# Altium PCB PCB_2021-01-26_15-46-11_2021-01-26.pcbdoc
Units mm, origin at the board's own origin, x right, y up, seen from the top; angles counter-clockwise.
Board outline 158.86 x 93.51 mm, 2 copper layers (Top Layer, Bottom Layer); 47 components, 76 nets, 202 pads, 50 vias.
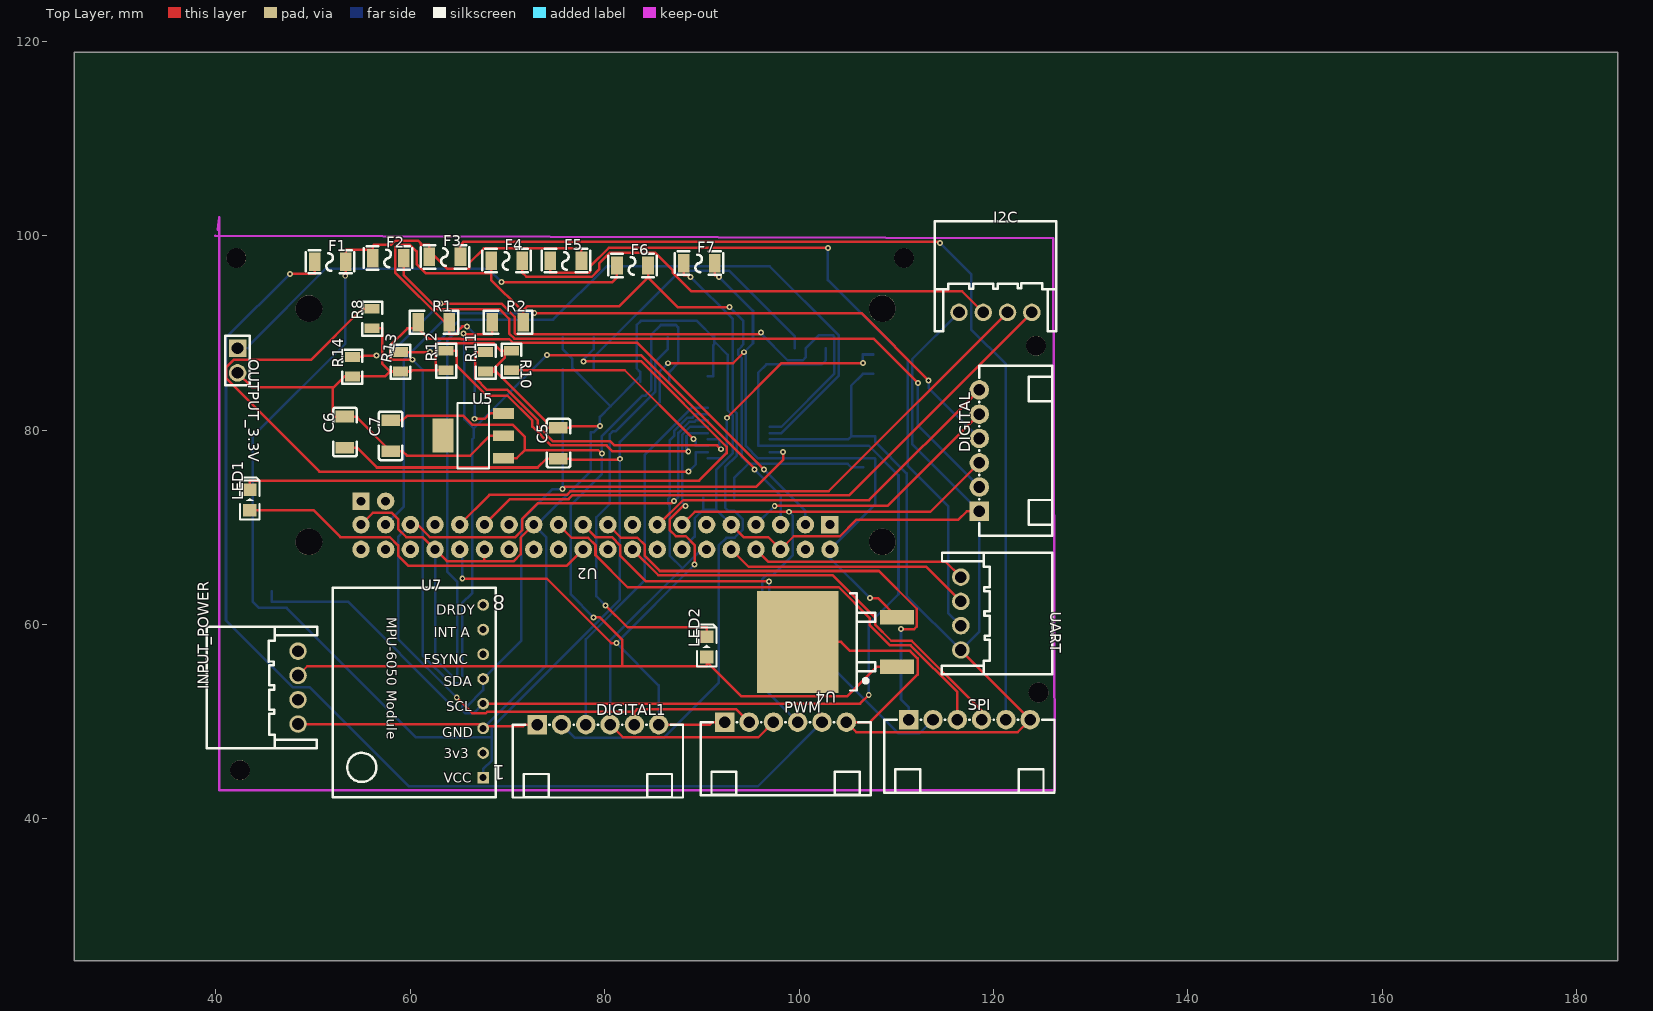
[diagram p0: Top Layer view]
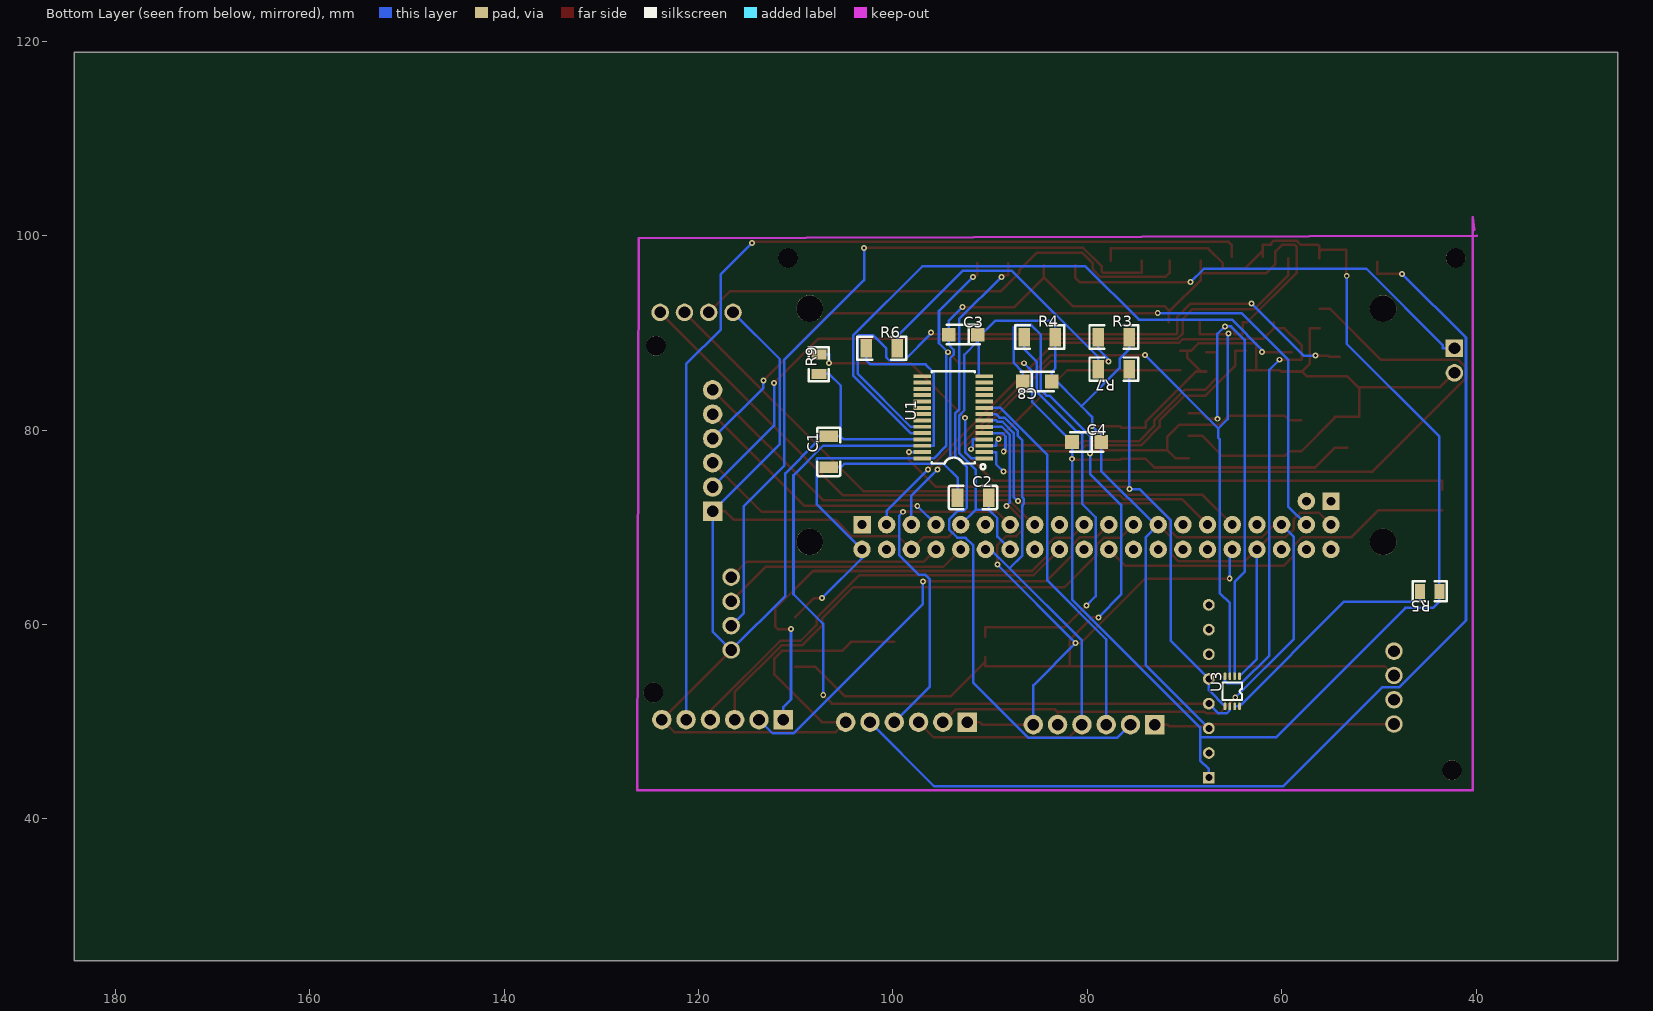
[diagram p1: Bottom Layer view, seen from below]

## Layer stack, top to bottom
Top Layer: signal copper (thickness not stored)
Dielectric: dielectric 0.32, FR-4, Dk 4.8
Bottom Layer: signal copper (thickness not stored)

## Board outline
184.259,25.4 25.4,25.4 25.4,118.914 184.259,118.914

## Components (designator, comment, footprint, x,y, rotation, side; value= is the part's Value field where it differs from the comment)
C1 "1uF" C1206#1 106.611,77.778 r270 bottom
C2 "1uF" C1206#1 91.752,73.079 r0 bottom
C3 "10uF" CAP-SMD_L3.2-W1.6-R-RD 92.768,89.843 r0 bottom
C4 "10uF" CAP-SMD_L3.2-W1.6-R-RD 80.068,78.794 r0 bottom
C5 "1uF" C1206#2 75.242,78.667 r90 top
C6 "1uF" C1206#2 53.271,79.81 r90 top
C7 "1uF" C1206#2 57.97,79.429 r90 top
C8 "10uF" CAP-SMD_L3.2-W1.6-R-RD 85.148,85.017 r180 bottom
DIGITAL "Digital" CONN-TH_XH-6AW_C722881 118.549,77.905 r90 top
DIGITAL1 "Digital" CONN-TH_XH-6AW_C722881 79.306,49.711 r0 top
F1 "1206FT 1.25A" F1206 51.747,97.336 r0 top
F2 "1206FT 1.25A" F1206 57.716,97.717 r0 top
F3 "1206FT 1.25A" F1206 63.558,97.844 r0 top
F4 "1206FT 1.25A" F1206 69.908,97.463 r0 top
F5 "1206FT 1.25A" F1206 76.004,97.463 r0 top
F6 "1206FT 1.25A" F1206 82.862,96.955 r0 top
F7 "1206FT 1.25A" F1206 89.72,97.209 r0 top
I2C "I2C" CONN-TH_XH-4AWD 120.2,92.129 r0 top
INPUT_POWER "Input Power" CONN-TH_XH-4AWD 48.445,53.521 r90 top
LED1 "LED-0805_B" LED0805_BLUE 43.492,72.825 r90 top
LED2 "LED-0805_B" LED0805_BLUE 90.482,57.712 r90 top
OUTPUT_3.3V "OUTPUT_POWER3.3V" HDR-TH_2P-P2.54-V 42.222,87.176 r270 top
PWM "PWM" CONN-TH_XH-6AW_C722881 98.61,49.965 r0 top
R1 "4.7K" R1206#1 62.415,91.113 r0 top
R2 "4.7K" R1206#1 70.035,91.113 r0 top
R3 "1k" R1206#2 77.274,89.589 r0 bottom
R4 "1k" R1206#2 84.894,89.589 r0 bottom
R5 "200K" R0805#1 44.762,63.427 r180 bottom
R6 "4.7K" R1206#2 101.15,88.446 r0 bottom
R7 "4.7K" R1206#2 77.274,86.287 r180 bottom
R8 "10K" R0805#2 56.065,91.494 r90 top
R9 "10K" R0805#1 107.627,86.795 r270 bottom
R10 "10K" R0805#2 70.416,87.176 r270 top
R11 "10K" R0805#2 67.749,87.049 r90 top
R12 "10K" R0805#2 63.685,87.176 r90 top
R13 "10K" R0805#2 58.986,87.049 r90 top
R14 "10K" R0805#2 54.033,86.541 r90 top
SPI "SPI" CONN-TH_XH-6AW_C722881 117.533,50.219 r0 top
U1 "PCA9685PW/Q900,118" TSSOP-28_L9.7-W4.4-P0.65-LS6.4-BL 93.784,81.334 r270 bottom
U2 "Raspberry Pi Zero W" "RASPBERRY PI ZERO" 79.052,80.445 r180 top
U3 "PCA9306DCUR" VSSOP-8_L2.4-W2.1-P0.50-LS3.2-BR 65.082,53.14 r270 bottom
U4 "MC7805CD2TR4G" TO-263-2_L10.0-W9.1-P5.08-LS15.2-TL 104.96,58.22 r180 top
U5 "MCP1703-3302E/DB" SOT-223_L6.5-W3.5-P2.30-LS7.0-BR 66.479,79.429 r0 top
U7 "SENSOR GY-87" "MPU-6050 GY-87" 67.495,53.902 r0 top
UART "UART" CONN-TH_XH-4AWD 116.644,61.141 r270 top
? "" ? 83.624,40.567 r0 top
? "" ? 154.147,74.373 r0 top

## Footprints (in the part's own frame and the unit in brackets; to place one, negate y for a bottom-side part, rotate by r counter-clockwise, add the part's x,y. Pads: shape width x height; smd on the part's side, far side on the other; paste and mask are expansions set on the pad)
C1206#1 [mm]
  rect 1.2x1.9 smd: 1(1.6,0) 2(-1.6,0)
  silkscreen extent -2.5,-1.2 2.5,1.2
C1206#2 [mm]
  rect 1.2x1.9 smd: 1(-1.6,0) 2(1.6,0)
  silkscreen extent -2.5,-1.2 2.5,1.2
CAP-SMD_L3.2-W1.6-R-RD [mm]
  rect 1.4x1.4 smd: 1(-1.5,0) 2(1.5,0)
  silkscreen extent -1.7,-1 1.7,1
CONN-TH_XH-4AWD [mm]
  round 1.8 hole 1.199: 1(-3.75,0) 2(-1.248,0) 3(1.251,0) 4(3.75,0)
  silkscreen extent -6.24,-1.96 6.26,9.39
CONN-TH_XH-6AW_C722881 [mm]
  rect 2x2 hole 1.2: 1(-6.25,0)
  round 2 hole 1.2: 2(-3.75,0) 3(-1.25,0) 4(1.25,0) 5(3.75,0) 6(6.25,0)
  silkscreen extent -8.75,-7.5 8.75,0
F1206 [mm]
  rect 1.2x1.9 smd: 1(-1.6,0) 2(1.6,0)
  silkscreen extent -2.5,-1.2 2.5,1.2
HDR-TH_2P-P2.54-V [mm]
  rect 1.8x1.8 hole 1.2: 1(-1.27,0)
  round 1.8 hole 1.2: 2(1.27,0)
  silkscreen extent -2.54,-1.27 2.54,1.27
LED0805_BLUE [mm]
  rect 1.3x1.4 smd: 1(-1.05,0) 2(1.05,0)
  silkscreen extent -2,-1 2.3,1
"MPU-6050 GY-87" [mil]
  rect 47.5x47.5 hole 28.6: 1(0,-380)
  round 47.5 hole 28.6: 2(0,-280) 3(0,-180) 4(0,-80) 5(0,20) 6(0,120) 7(0,220) 8(0,320)
  silkscreen extent -610,-460 51,390
R0805#1 [mm]
  rect 1x1.55 smd: 1(1,0) 2(-1,0)
  silkscreen extent -1.75,-1.02 1.75,1.02
R0805#2 [mm]
  rect 1x1.55 smd: 1(-1,0) 2(1,0)
  silkscreen extent -1.75,-1.02 1.75,1.02
R1206#1 [mm]
  rect 1.2x1.9 smd: 1(-1.6,0) 2(1.6,0)
  silkscreen extent -2.5,-1.2 2.5,1.2
R1206#2 [mm]
  rect 1.2x1.9 smd: 1(1.6,0) 2(-1.6,0)
  silkscreen extent -2.5,-1.2 2.5,1.2
"RASPBERRY PI ZERO" [mm]
  rect 1.8x1.8 hole 0.914: 1(-24.13,10.16) 42(24.13,7.747)
  round 1.8 hole 0.914: 2(-24.131,12.7) 3(-21.591,10.16) 4(-21.591,12.7) 5(-19.051,10.16) 6(-19.051,12.7) 7(-16.511,10.16) 8(-16.511,12.7) 9(-13.971,10.16) 10(-13.971,12.7) 11(-11.431,10.16) 12(-11.431,12.7) 13(-8.891,10.16) 14(-8.891,12.7) 15(-6.351,10.16) 16(-6.351,12.7) 17(-3.811,10.16) 18(-3.811,12.7) 19(-1.271,10.16) 20(-1.271,12.7) 21(1.269,10.16) 22(1.269,12.7) 23(3.809,10.16) 24(3.809,12.7) 25(6.349,10.16) 26(6.349,12.7) 27(8.889,10.16) 28(8.889,12.7) 29(11.429,10.16) 30(11.429,12.7) 31(13.969,10.16) 32(13.969,12.7) 33(16.509,10.16) 34(16.509,12.7) 35(19.049,10.16) 36(19.049,12.7) 37(21.589,10.16) 38(21.589,12.7) 39(24.13,10.16) 40(24.13,12.7) 41(21.59,7.747)
  round 2.748 hole 2.748 unplated: ""(-29.513,-12.07) ""(-29.513,11.931) ""(29.486,-12.07) ""(29.486,11.931)
SOT-223_L6.5-W3.5-P2.30-LS7.0-BR [mil]
  rect 85x43 smd: 1(122,-90.5) 2(122,0.5) 3(122,90.5)
  rect 85x138 smd: 4(-122,0.5)
  silkscreen extent -64,-132 64,132
TO-263-2_L10.0-W9.1-P5.08-LS15.2-TL [mm]
  rect 3.504x1.5 smd: 1(-5.106,2.54) 3(-5.106,-2.54)
  rect 8.38x10.49 smd: 4(5.107,0)
  silkscreen extent -2.89,-5 -0.29,5
TSSOP-28_L9.7-W4.4-P0.65-LS6.4-BL [mil]
  rect 16x71 smd: 1(166.34,125.98) 2(140.75,125.98) 3(115.16,125.98) 4(89.57,125.98) 5(63.98,125.98) 6(38.39,125.98) 7(12.8,125.98) 8(-12.79,125.98) 9(-38.38,125.98) 10(-63.97,125.98) 11(-89.56,125.98) 12(-115.15,125.98) 13(-140.74,125.98) 14(-166.34,125.98) 15(-166.34,-125.98) 16(-140.75,-125.98) 17(-115.16,-125.98) 18(-89.57,-125.98) 19(-63.98,-125.98) 20(-38.39,-125.98) 21(-12.8,-125.98) 22(12.79,-125.98) 23(38.38,-125.98) 24(63.97,-125.98) 25(89.57,-125.98) 26(115.16,-125.98) 27(140.75,-125.98) 28(166.34,-125.98)
  silkscreen extent -187,-87 210,130
VSSOP-8_L2.4-W2.1-P0.50-LS3.2-BR [mm]
  oval 0.8x0.28 smd: 1(-1.55,0.75) 2(-1.55,0.25) 3(-1.55,-0.25) 4(-1.55,-0.75) 5(1.55,-0.75) 6(1.55,-0.25) 7(1.55,0.25) 8(1.55,0.75)
  silkscreen extent -0.9,-1 0.9,1.02
? [mm]

## Free pads (board coordinates)
  round 2.032 hole 2.032 unplated: ""(42.095,97.717) ""(42.476,45.012) ""(110.802,97.717) ""(124.391,88.7) ""(124.645,53.013)

## Via types
v1: diameter 0.61, hole 0.31, Top Layer to Bottom Layer, 50 vias

## Nets (pads, with @x,y where several pads share a name; then routed paths per layer and width w, separated by ;. In a path a pad name is that pad's centre, name@x,y a point inside that pad or via, vN(x,y) a via of type N, cw(c..) or ccw(c..) an arc to the next point about the centre after c; other vN are vias at no path point)
3.3V: C1.1 C2.1 C3.2 F4.1 F6.2 R1.2 R2.2 U3.2 U5.3 | length 142.9
  Top Layer w0.26: v1(65.844,90.696) 65.359,90.696 64.882,90.219 64.882,89.919 64.831,89.871 64.016,89.871 R1.2 63.564,91.113 58.425,96.254 58.425,98.875 58.636,99.086 59.959,99.086 60.637,98.408 60.637,97.115 61.603,96.147 68.308,96.147 ; v1(66.612,81.182) 67.661,81.182 68.207,81.728 U5.3 ; F4.1 68.308,96.147 ; R2.2 71.636,92.355 ; F6.2 84.463,95.713 ; v1(92.847,92.678) 87.498,92.678 84.463,95.713 ; 68.308,96.147 68.308,95.464 71.417,92.355 71.636,92.355 ; 71.636,92.355 72.019,92.739 81.488,92.739 84.463,95.713
  Bottom Layer w0.26: U3.2 64.834,64.397 63.812,65.418 63.812,89.307 65.204,90.696 v1(65.844,90.696) 66.612,89.932 v1(66.612,81.182) ; v1(92.847,92.678) 94.27,91.258 C3.2 94.27,89.348 94.27,88.85 94.099,88.68 94.099,88.636 93.739,88.276 93.739,87.78 94.099,87.42 94.099,77.234 94.778,76.556 ; C2.1 93.353,74.321 93.353,75.129 94.778,76.556 ; C1.1 105.369,76.178 104.991,76.556 94.778,76.556
5V: R6.2 R7.2 | length 29.6
  Bottom Layer w0.26: R7.2 78.875,87.529 87.78,96.434 92.804,96.434 99.55,89.688 R6.2
7.4V: C7.2 C8.1 INPUT_POWER.3 LED2.1 U4.1 U5.1 | length 142.1
  Top Layer w0.26: INPUT_POWER.3@48.445,54.771 49.393,55.718 81.796,55.718 ; C7.2 59.213,81.029 59.67,81.486 65.461,81.486 66.365,80.585 70.5,80.585 71.78,79.302 71.78,77.961 ; U5.1 70.95,77.13 71.78,77.961 ; v1(78.867,60.75) 79.494,60.75 81.796,58.449 81.796,55.718 ; v1(79.703,77.593) 79.334,77.961 71.78,77.961 ; LED2.1@90.482,56.66 LED2.1@90.482,56.191 ; U4.1@110.068,55.68 108.024,55.68 104.978,52.637 94.036,52.637 LED2.1@90.482,56.191 ; 81.796,55.718 90.482,55.718 LED2.1@90.482,56.191
  Bottom Layer w0.26: v1(78.867,60.75) 76.512,63.102 76.512,72.309 79.703,75.5 v1(79.703,77.593) 79.703,79.391 83.884,83.574 84.214,83.574 84.788,84.148 84.788,89.846 85.773,90.831 87.315,90.831 87.564,90.582 87.564,86.925 86.65,86.01 C8.1
+5V: C4.2 C5.1 C6.1 F1.2 F2.1 F3.1 F5.2 F7.2 R5.1 U1.28 U2.2 U4.3 U7.1 | length 246.1
  Top Layer w0.26: C6.1 54.514,78.21 56.556,76.168 73.101,76.168 74,77.067 74.623,77.067 C5.1 76.485,77.067 76.609,76.945 81.445,76.945 v1(81.57,77.067) ; v1(53.302,95.898) 53.348,95.944 F1.2 53.348,97.852 53.348,98.578 55.878,98.578 F2.1@56.116,98.337 ; F2.1 F2.1@56.116,98.337 ; F3.1 F3.1@61.958,98.464 ; F5.2 77.605,98.705 67.572,98.705 66.05,97.184 66.05,96.678 65.974,96.602 63.823,96.602 F3.1@61.958,98.464 ; v1(86.523,86.899) 93.208,86.899 v1(94.336,88.029) ; F7.2 91.321,95.967 91.585,95.967 v1(91.77,95.781) ; v1(107.29,62.723) 108.105,62.723 U4.3@110.068,60.76 ; F2.1@56.116,98.337 56.116,98.959 56.243,99.086 58.037,99.086 58.461,99.51 60.813,99.51 61.062,99.261 61.062,99.086 61.958,99.086 F3.1@61.958,98.464
  Bottom Layer w0.26: v1(53.302,95.898) 53.302,88.883 43.762,79.343 R5.1 43.762,62.36 44.407,61.715 47.275,61.715 60.587,48.403 68.392,48.403 ; U7.1 67.495,45.147 68.392,46.041 68.392,48.403 ; v1(86.523,86.899) 85.656,86.033 85.656,82.881 C4.2 v1(81.57,77.067) 81.57,62.604 68.392,49.426 68.392,48.403 ; v1(91.77,95.781) 95.26,92.292 95.26,88.954 v1(94.336,88.029) 94.521,87.841 94.521,78.377 95.791,77.11 U1.28 107.777,77.11 107.854,77.034 107.854,72.416 U2.2 103.182,66.828 v1(107.29,62.723)
A0: R9.2 U1.1 | length 24
  Top Layer w0.26: v1(92.57,81.286) 98.204,86.919 v1(106.561,86.919)
  Bottom Layer w0.26: U1.1 91.895,77.11 92.57,77.786 v1(92.57,81.286) ; v1(106.561,86.919) 106.561,87.796 R9.2
A1: R8.2 U1.2 | length 73.8
  Top Layer w0.26: R8.2 54.999,92.495 49.759,87.252 41.811,87.252 41.031,86.472 41.031,85.36 50.648,75.741 v1(88.631,75.741)
  Bottom Layer w0.26: v1(88.631,75.741) 89.39,76.503 89.39,77.758 U1.2@90.584,77.758
A2: R10.2 U1.3 | length 23.6
  Top Layer w0.26: R10.2@70.416,86.175 71.483,86.175 82.06,86.175 v1(89.134,79.104)
  Bottom Layer w0.26: v1(89.134,79.104) 89.39,78.845 89.39,78.408 U1.3@90.584,78.408
A3: R11.2 U1.4 | length 34.7
  Top Layer w0.26: R11.2 66.683,88.05 66.683,85.357 67.894,84.146 69.995,84.146 73.124,81.016 73.124,80.417 74.681,78.863 80.589,78.863 81.013,78.438 91.565,78.438 v1(91.956,78.047)
  Bottom Layer w0.26: U1.4@90.584,79.058 91.778,79.058 91.778,78.222 v1(91.956,78.047)
A4: R12.2 U1.5 | length 34.4
  Top Layer w0.26: R12.2 64.752,88.177 64.752,86.655 67.836,83.572 69.969,83.572 72.553,80.991 72.553,80.371 74.486,78.438 80.203,78.438 80.81,77.831 v1(88.598,77.831)
  Bottom Layer w0.26: v1(88.598,77.831) 88.417,78.012 88.417,79.386 88.74,79.708 U1.5
A5: R13.2 U1.24 | length 65.5
  Top Layer w0.26: R13.2 60.053,88.05 60.071,88.032 v1(62.009,88.032)
  Bottom Layer w0.26: v1(62.009,88.032) 62.009,88.258 65.131,91.377 74.699,91.377 80.193,96.869 96.985,96.869 104.066,89.787 104.066,85.596 98.179,79.708 U1.24@96.985,79.708
CLK: DIGITAL.3 PWM.4 U2.13 | length 58.3
  Top Layer w0.26: U2.13 89.271,71.613 v1(98.961,71.613) 113.508,71.613 DIGITAL.3
  Bottom Layer w0.26: v1(98.961,71.613) 99.372,71.202 99.372,67.171 97.353,65.149 96.69,65.149 96.192,64.654 96.192,53.633 PWM.4
DIGITAL1: DIGITAL.6 U2.15 | length 38.9
  Top Layer w0.26: U2.15 85.552,70.285 88.082,72.815 107.211,72.815 DIGITAL.6
DIGITAL1_2: DIGITAL1.2 F7.1 | length 68
  Top Layer w0.26: F7.1 88.12,95.967 88.661,95.967 v1(88.837,95.789)
  Bottom Layer w0.26: DIGITAL1.2 76.927,48.342 86.058,48.342 91.752,54.037 91.752,68.174 92.517,68.936 93.376,68.936 94.216,69.777 94.216,70.806 93.292,71.728 92.692,71.728 92.393,72.03 92.393,76.221 93.591,77.422 93.591,81.71 93.183,82.116 93.183,91.446 v1(88.837,95.789)
DIGITAL2: DIGITAL.5 U2.7 | length 27.7
  Top Layer w0.26: v1(97.495,72.218) 109.113,72.218 DIGITAL.5@118.549,81.654
  Bottom Layer w0.26: U2.7 v1(97.495,72.218)
DIGITAL3: DIGITAL.4 U2.37 | length 84.8
  Top Layer w0.26: v1(72.751,92.058) 106.424,92.058 v1(113.337,85.141)
  Bottom Layer w0.26: U2.37 59.299,72.121 59.299,87.227 64.13,92.058 v1(72.751,92.058) ; v1(113.337,85.141) 113.337,84.367 DIGITAL.4
DIGITAL_2: DIGITAL.2 F2.2 | length 73.5
  Top Layer w0.26: F2.2 59.317,96.475 59.317,95.959 62.842,92.434 69.21,92.434 70.168,91.474 70.168,89.978 70.711,89.437 107.671,89.437 v1(112.227,84.88)
  Bottom Layer w0.26: v1(112.227,84.88) 112.227,80.478 DIGITAL.2
GND: C1.2 C2.2 C3.1 C4.1 C5.2 C6.2 C7.1 C8.2 DIGITAL1.1 DIGITAL.1 I2C.1 INPUT_POWER.1 OUTPUT_3.3V.2 PWM.6 R3.2 R4.2 R8.1 R9.1 R10.1 R11.1 R12.1 R13.1 R14.1 SPI.6 U1.14 U1.25 U2.6 U2.9 U2.14 U2.25 U2.30 U2.34 U2.39 U3.1 U4.4 U5.2 U7.3 UART.4 | length 412.5
  Top Layer w0.26: OUTPUT_3.3V.2 43.686,84.443 52.029,84.443 ; INPUT_POWER.1@48.445,49.769 67.275,49.769 U7.3@67.495,49.551 ; U2.39 56.129,71.491 58.108,71.491 58.745,70.854 58.745,69.851 59.581,69.015 61.272,69.015 U2.34 63.759,66.528 67.622,66.528 ; R8.1@56.065,90.493 57.132,90.493 57.132,86.836 57.92,86.048 ; C7.1 C7.1@57.986,77.829 ; R12.1@63.685,86.175 62.606,86.175 ; U7.3 U7.3@67.495,49.551 ; U2.30 67.622,66.528 ; R11.1@67.749,86.048 R11.1@68.283,86.048 ; U5.2 68.892,79.442 68.207,79.442 66.162,77.397 59.644,77.397 59.213,77.829 58.593,77.829 58.001,77.829 C7.1@57.986,77.829 ; R10.1 R10.1@69.693,88.177 ; U2.25 71.356,68.936 71.356,67.24 70.645,66.528 67.622,66.528 ; DIGITAL1.1 71.765,49.711 71.603,49.551 U7.3@67.495,49.551 ; v1(79.507,80.432) 76.65,80.432 76.485,80.267 C5.2 74,80.267 74,80.864 68.816,86.048 R11.1@68.283,86.048 ; U2.9 94.292,69.015 96.832,69.015 U2.6 99.451,69.091 104.204,69.091 105.877,70.768 116.37,70.768 117.257,71.654 DIGITAL.1@118.549,71.654 ; U4.4 104.336,58.22 105.26,57.295 111.437,57.295 112.199,56.533 112.199,54.865 107.3,49.965 PWM.6 105.9,48.926 122.492,48.926 SPI.6 116.644,57.359 UART.4@116.644,57.389 ; 52.029,84.443 52.029,81.41 C6.2 54.514,81.41 54.514,81.301 C7.1@57.986,77.829 ; 52.029,84.443 52.136,84.443 53.233,85.54 53.5,85.54 54.033,85.54 57.412,85.54 57.92,86.048 ; 57.92,86.048 58.986,86.048 60.053,86.048 60.18,86.175 62.606,86.175 ; 62.606,86.175 62.606,88.873 62.703,88.969 65.039,88.969 65.057,88.951 68.575,88.951 69.35,88.177 R10.1@69.693,88.177 ; R11.1@68.283,86.048 69.693,87.458 R10.1@69.693,88.177
  Bottom Layer w0.26: U2.34 62.542,56.48 U3.1 ; U7.3 73.972,55.807 73.972,69.015 U2.25 73.045,70.285 78.57,75.809 78.57,78.794 78.57,79.787 78.862,79.787 v1(79.507,80.432) 79.507,81.372 80.607,82.472 ; R3.2 75.674,88.347 76.675,87.346 76.675,86.404 80.607,82.472 ; C8.2 C8.2@83.647,85.512 ; U2.14 89.261,69.061 89.261,70.945 90.152,71.837 ; C2.2 90.152,72.695 90.152,72.457 90.152,71.837 ; U1.14@90.584,85.558 91.181,85.558 91.181,88.763 91.27,88.85 C3.1@91.27,89.157 ; C3.1@91.27,89.843 C3.1@91.27,89.467 ; U2.9 91.471,71.837 ; U1.25@96.985,79.058 105.049,79.058 105.369,79.378 ; R9.1@107.627,85.794 107.094,85.794 106.561,85.794 105.369,84.603 105.369,79.378 ; I2C.1 111.631,87.308 111.631,78.576 118.549,71.654 118.549,59.294 116.644,57.389 111.077,62.957 111.077,75.555 107.854,78.779 107.854,79.378 C1.2 105.992,79.378 105.369,79.378 ; 80.607,82.472 C8.2@83.647,85.512 ; C8.2@83.647,85.512 83.647,86.01 83.294,86.363 R4.2 83.294,90.831 83.718,91.255 89.482,91.255 C3.1@91.27,89.467 ; 90.152,71.837 91.471,71.837 ; C3.1@91.27,89.157 C3.1@91.27,89.467 ; C3.1@91.27,89.157 92.662,87.765 92.662,82.04 93.167,81.535 93.167,77.62 91.471,75.924 91.471,71.837
I2C_2: F4.2 I2C.2 | length 52.9
  Top Layer w0.26: F4.2 71.509,96.221 71.933,95.797 78.674,95.797 79.423,96.549 79.423,97.145 80.559,98.281 85.166,98.281 87.023,96.424 87.023,96.185 88.923,94.288 116.794,94.288 I2C.2
INPUT_POWER_2: INPUT_POWER.2
INPUT_POWER_4: INPUT_POWER.4
LED1_2: LED1.2 R3.1 | length 73.2
  Top Layer w0.26: LED1.2@43.492,73.874 43.492,74.819 89.72,74.819 92.553,77.651 92.553,78.301 83.774,87.082 v1(77.805,87.082)
  Bottom Layer w0.26: v1(77.805,87.082) 77.805,87.278 78.875,88.347 R3.1
OE: R14.2 U1.23 | length 69.9
  Top Layer w0.26: R14.2 55.1,87.542 55.232,87.671 v1(56.51,87.671) ; v1(63.089,93.031) 69.378,93.031 70.744,91.664 70.744,90.003 70.886,89.858 95.86,89.858 v1(96.065,90.064)
  Bottom Layer w0.26: v1(56.51,87.671) 57.732,87.671 v1(63.089,93.031) ; v1(96.065,90.064) 96.065,89.967 98.829,87.204 100.391,87.204 100.703,87.519 100.703,88.461 102.006,89.762 103.492,89.762 103.642,89.612 103.642,85.825 98.179,80.359 U1.23
OUTPUT_3.3V_1: F6.1 OUTPUT_3.3V.1 | length 44.6
  Top Layer w0.26: v1(69.37,95.246) 80.797,95.246 81.262,95.713 F6.1
  Bottom Layer w0.26: OUTPUT_3.3V.1 43.414,88.446 43.414,88.743 51.288,96.617 68.001,96.617 v1(69.37,95.246)
PWM0: DIGITAL1.6 PWM.1 U1.6 U2.32 | length 69.2
  Top Layer w0.26: v1(65.344,64.733) 74.039,64.733 80.673,58.101 v1(81.196,58.101) ; DIGITAL1.6 90.815,49.711 91.069,49.965 PWM.1 ; v1(88.326,72.208) 88.072,72.208 86.672,70.808 86.672,69.736 87.318,69.091 88.349,69.091 89.258,68.182 v1(89.258,66.183)
  Bottom Layer w0.26: U2.32 65.344,67.483 v1(65.344,64.733) ; DIGITAL1.6 85.557,53.739 v1(81.196,58.101) 89.258,66.16 v1(89.258,66.183) ; v1(88.326,72.208) 87.996,72.538 87.996,79.561 88.793,80.359 89.39,80.359 U1.6
PWM1: DIGITAL1.5 PWM.2 U1.7 U2.35 | length 94.2
  Top Layer w0.26: U2.35 60.729,70.285 61.999,69.015 70.815,69.015 71.511,69.711 71.511,70.856 73.155,72.5 86.921,72.5 v1(87.122,72.701) ; v1(64.775,52.485) 66.378,50.882 67.783,50.882 67.922,51.024 83.056,51.024 ; DIGITAL1.5 83.056,51.024 ; PWM.2 93.541,51.286 83.32,51.286 83.056,51.024
  Bottom Layer w0.26: U2.35 58.732,69.015 58.732,58.527 v1(64.775,52.485) ; v1(87.122,72.701) 87.572,73.15 87.572,79.736 88.715,80.879 89.261,80.879 89.39,81.009 U1.7
PWM2: DIGITAL1.4 PWM.3 U1.8 U2.12 | length 59.6
  Top Layer w0.26: DIGITAL1.4 81.862,48.408 95.804,48.408 PWM.3
  Bottom Layer w0.26: DIGITAL1.4 80.556,58.365 87.993,65.799 ; U2.12 89.939,67.745 87.993,65.799 ; U1.8 89.39,81.659 89.035,81.303 88.539,81.303 87.15,79.912 87.15,79.416 86.672,78.941 86.672,73.097 86.525,72.947 86.525,72.454 86.629,72.35 86.629,72.259 86.672,72.213 86.672,67.12 87.993,65.799
PWM3: DIGITAL1.3 U1.9 | length 38.7
  Bottom Layer w0.26: DIGITAL1.3 78.057,58.494 84.132,64.573 84.132,77.493 88.948,82.309 89.39,82.309 U1.9
PWM_5: F1.1 PWM.5 | length 113.3
  Top Layer w0.26: v1(47.597,96.094) 50.147,96.094 F1.1
  Bottom Layer w0.26: v1(47.597,96.094) 41.031,89.525 41.031,60.445 47.894,53.579 49.639,53.579 59.863,43.353 95.75,43.353 PWM.5
R4_1: LED2.2 R4.1 | length 43.5
  Top Layer w0.26: v1(80.096,61.979) 82.37,59.706 90.482,59.706 LED2.2@90.482,58.761
  Bottom Layer w0.26: v1(80.096,61.979) 79.129,62.944 79.129,71.044 80.518,72.434 80.518,79.579 80.818,79.879 81.118,79.879 85.209,83.973 85.209,87.062 86.495,88.347 R4.1
R5_2: R5.2 U3.7 U3.8 | length 24.6
  Bottom Layer w0.26: R5.2 45.763,62.36 53.564,62.36 U3.8 U3.7
SCL: R2.1 U2.5 U3.3 | length 84.2
  Top Layer w0.26: v1(65.479,89.973) 65.58,89.871 68.435,89.871 R2.1 ; v1(74.084,87.742) 83.749,87.742 95.415,76.076 v1(95.415,75.957)
  Bottom Layer w0.26: U3.3@65.334,54.689 65.334,62.205 66.352,63.224 66.352,79.053 66.523,79.221 66.523,80.181 ; v1(65.479,89.973) 65.547,89.901 65.547,81.154 66.523,80.181 ; v1(74.084,87.742) 66.523,80.181 ; v1(95.415,75.957) 98.102,73.269 U2.5
SCL_I2C_1: I2C.4 U2.29 | length 65.4
  Top Layer w0.26: U2.29 70.262,72.924 76.281,72.924 76.655,73.297 105.121,73.297 I2C.4
SCL_SLAVE: R6.1 U1.26 U3.6 U7.4 | length 99
  Top Layer w0.26: U7.4 106.289,51.87 v1(107.17,52.751)
  Bottom Layer w0.26: U3.6@65.334,51.591 65.334,51.194 65.651,50.877 66.502,50.877 U7.4 ; R6.1 102.751,87.204 102.329,86.78 96.65,86.78 95.791,85.921 95.791,78.408 96.388,78.408 96.985,78.408 107.188,78.408 110.231,75.365 110.231,63.127 107.17,60.067 v1(107.17,52.751)
SDA: R1.1 U2.3 U3.4 | length 94.2
  Top Layer w0.26: v1(60.241,87.257) 57.996,87.257 57.92,87.331 57.92,88.72 59.693,90.491 R1.1@60.815,90.491 ; R1.1 R1.1@60.815,90.491 ; v1(96.373,75.959) 83.32,89.012 70.536,89.012 70.175,89.373 65.232,89.373 65.169,89.437 61.872,89.437 R1.1@60.815,90.491
  Bottom Layer w0.26: v1(60.241,87.257) 61.272,86.226 61.272,56.836 64.13,53.978 65.59,53.978 65.834,54.222 U3.4@65.834,54.689 ; v1(96.373,75.959) 100.642,71.69 U2.3
SDA_I2C_1: I2C.3 U2.31 | length 65.4
  Top Layer w0.26: U2.31 68.146,73.346 76.106,73.346 76.479,73.722 103.043,73.722 I2C.3
SDA_SLAVE: R7.1 U1.27 U3.5 U7.5 | length 65.5
  Top Layer w0.26: v1(75.674,73.943) 75.898,74.166 95.57,74.166 98.359,76.952 v1(98.359,77.758)
  Bottom Layer w0.26: U3.5@65.834,51.591 67.495,53.252 U7.5 71.432,58.347 71.432,70.762 74.615,73.943 v1(75.674,73.943) 75.674,85.665 R7.1 ; U1.27@96.985,77.758 v1(98.359,77.758)
SPI_5: F3.2 SPI.5 | length 102.6
  Top Layer w0.26: F3.2 65.159,99.086 65.451,99.378 114.399,99.378 v1(114.503,99.274)
  Bottom Layer w0.26: v1(114.503,99.274) 117.701,96.076 117.701,90.387 121.283,86.805 SPI.5
SPI_MISO: SPI.2 U2.21 | length 47.5
  Top Layer w0.26: U2.21 79.052,69.015 80.744,69.015 81.592,68.164 81.592,67.12 84.267,64.446 v1(96.914,64.446)
  Bottom Layer w0.26: v1(96.914,64.446) 96.914,62.124 110.231,48.807 112.37,48.807 SPI.2
SPI_MOSI: SPI.1 U2.19 | length 49.2
  Top Layer w0.26: U2.19 81.671,68.936 83.37,68.936 84.132,68.174 84.132,67.072 85.687,65.517 108.224,65.517 112.111,61.631 112.111,59.792 111.852,59.533 v1(110.49,59.533)
  Bottom Layer w0.26: v1(110.49,59.533) 110.49,52.307 111.283,51.512 SPI.1
SPI_SCLK: SPI.3 U2.23 | length 52
  Top Layer w0.26: U2.23 76.591,68.936 78.29,68.936 79.052,68.174 79.052,67.161 82.365,63.849 104.089,63.849 107.269,60.669 107.269,59.957 109.365,57.864 111.468,57.864 116.284,53.049 SPI.3
SPICS0: SPI.4 U2.18 | length 44.1
  Top Layer w0.26: U2.18 85.512,65.096 103.442,65.096 107.826,60.712 107.826,60.001 109.487,58.342 111.59,58.342 118.783,51.146 SPI.4
U1_10: U1.10
U1_11: U1.11
U1_12: U1.12
U1_13: U1.13
U1_15: U1.15
U1_16: U1.16
U1_17: U1.17
U1_18: U1.18
U1_19: U1.19
U1_20: U1.20
U1_21: U1.21
U1_22: U1.22
U2_1: U2.1
U2_4: U2.4
U2_11: U2.11
U2_16: U2.16
U2_17: U2.17
U2_20: U2.20
U2_22: LED1.1 U2.22 | length 38
  Top Layer w0.26: LED1.1@43.492,71.773 50.036,71.773 52.797,69.015 57.884,69.015 58.732,68.164 58.732,67.113 59.776,66.069 76.106,66.069 U2.22
U2_24: U2.24
U2_26: U2.26
U2_27: U2.27
U2_28: U2.28
U2_33: U2.33
U2_36: U2.36
U2_38: U2.38
U2_40: U2.40
U5_4: U5.4
U7_2: U7.2
U7_6: U7.6
U7_7: U7.7
U7_8: U7.8
UART_3: F5.1 UART.3 | length 75.7
  Top Layer w0.26: F5.1 74.404,96.221 78.423,96.221 78.499,96.297 78.499,96.843 80.414,98.761 v1(102.964,98.761)
  Bottom Layer w0.26: v1(102.964,98.761) 102.964,95.449 111.201,87.212 111.201,76.328 115.339,72.193 115.339,61.197 UART.3@116.644,59.889
UART_RX: U2.8 UART.1 | length 22.3
  Top Layer w0.26: U2.8 96.817,66.49 115.044,66.49 UART.1@116.644,64.89
UART_TX: U2.10 UART.2 | length 25.8
  Top Layer w0.26: U2.10 94.826,65.942 113.094,65.942 UART.2@116.644,62.388
pads on no net: U2. U2.41 U2.42

## Text inside footprints (layer, text, board x,y; h text height)
U7: Top Overlay "1" at 69.781,45.509 h1.5 r180; Top Overlay "8" at 69.781,63.035 h1.5 r180; Top Overlay "VCC" at 63.431,43.735 h1.03; Top Overlay "3v3" at 63.431,46.275 h1.03; Top Overlay "GND" at 63.305,48.434 h1.03; Top Overlay "SCL" at 63.685,51.101 h1.03; Top Overlay "SDA" at 63.431,53.641 h1.03; Top Overlay "FSYNC" at 61.399,55.927 h1.03; Top Overlay "INT A" at 62.415,58.721 h1.03; Top Overlay "DRDY" at 62.669,61.007 h1.03; Top Overlay "MPU-6050 Module" at 57.582,60.76 h1.03 r270